# EAGLE board Jam Final (EAGLE 9.6.0)
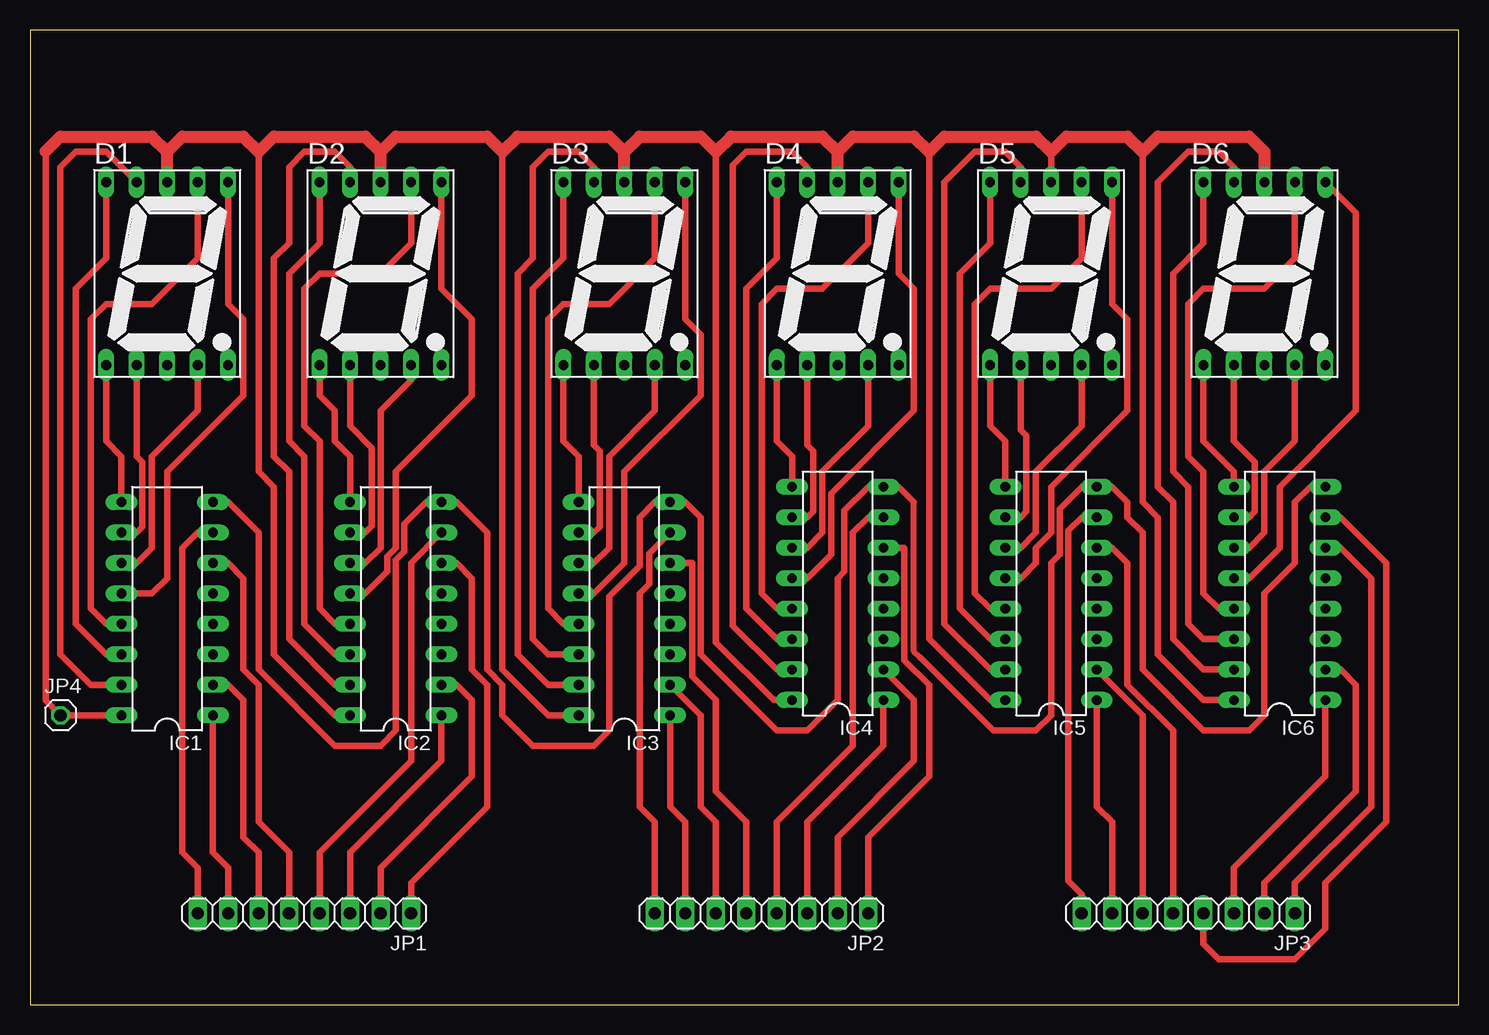
[diagram p0: board, top side]

Size 119.05 x 81.27 mm. Coordinates in mm from the lower left corner, seen from the top.
Outline: 0,0 119.05,0 119.05,81.27 0,81.27 0,0
Copper layers (1*16): Top 0.035mm / dielectric 1.5mm / Bottom 0.035mm
Design rules "default": minimum track width 6mil, minimum drill 0.35mm, track to track 6mil, track to pad 6mil, pad to pad 6mil, via to via 6mil, smd to smd 6mil, copper to edge 40mil, drill to drill 6mil, minimum pad ring 10mil, minimum via ring 8mil, stop-mask expansion 4mil, vias tented up to drill 0mil, thermal gap 10mil

## Footprints (pad centres in the part's own frame; a part is rotated, then mirrored left to right if it is on the bottom)
7SEG-13 = drill 0.813 long: 1 -5.08,-7.62; 2 -2.54,-7.62; 3 0,-7.62; 4 2.54,-7.62; 5 5.08,-7.62; 6 5.08,7.62; 7 2.54,7.62; 8 0,7.62; 9 -2.54,7.62; 10 -5.08,7.62
DIL16 = drill 0.813 long: 1 -8.89,-3.81; 2 -6.35,-3.81; 3 -3.81,-3.81; 4 -1.27,-3.81; 5 1.27,-3.81; 6 3.81,-3.81; 7 6.35,-3.81; 8 8.89,-3.81; 9 8.89,3.81; 10 6.35,3.81; 11 3.81,3.81; 12 1.27,3.81; 13 -1.27,3.81; 14 -3.81,3.81; 15 -6.35,3.81; 16 -8.89,3.81
1X08 = drill 1.016 long: 1 -8.89,0; 2 -6.35,0; 3 -3.81,0; 4 -1.27,0; 5 1.27,0; 6 3.81,0; 7 6.35,0; 8 8.89,0
1X01 = drill 1.016 octagon: 1 0,0

## Placement (x,y rotation side)
D1  [7SEG-13]  11.43,60.96 0 top
D2  [7SEG-13]  29.21,60.96 0 top
D3  [7SEG-13]  49.53,60.96 0 top
D4  [7SEG-13]  67.31,60.96 0 top
D5  [7SEG-13]  85.09,60.96 0 top
D6  [7SEG-13]  102.87,60.96 0 top
IC1  74LS47N  [DIL16]  11.43,33.02 90 top
IC2  74LS47N  [DIL16]  30.48,33.02 90 top
IC3  74LS47N  [DIL16]  49.53,33.02 90 top
IC4  74LS47N  [DIL16]  67.31,34.29 90 top
IC5  74LS47N  [DIL16]  85.09,34.29 90 top
IC6  74LS47N  [DIL16]  104.14,34.29 90 top
JP1  [1X08]  22.86,7.62 180 top
JP2  [1X08]  60.96,7.62 180 top
JP3  [1X08]  96.52,7.62 180 top
JP4  [1X01]  2.54,24.13 0 top

## Library data of the parts
D1-D6 = special
IC1-IC6 = 74xx-eu
JP1-JP4 = pinhead

## Nets
GND: IC1.8 IC2.8 IC3.8 IC4.8 IC5.8 IC6.8
N$1: D1.7 IC1.13
N$2: D1.6 IC1.12
N$3: D1.4 IC1.11
N$4: D1.2 IC1.10
N$5: D1.1 IC1.9
N$6: D1.9 IC1.15
N$7: D1.10 IC1.14
N$8: D2.7 IC2.13
N$9: D2.6 IC2.12
N$10: D2.4 IC2.11
N$11: D2.2 IC2.10
N$12: D2.1 IC2.9
N$13: D2.9 IC2.15
N$14: D2.10 IC2.14
N$15: D3.7 IC3.13
N$16: D3.6 IC3.12
N$17: D3.4 IC3.11
N$18: D3.2 IC3.10
N$19: D3.1 IC3.9
N$20: D3.9 IC3.15
N$21: D3.10 IC3.14
N$22: D4.7 IC4.13
N$23: D4.6 IC4.12
N$24: D4.4 IC4.11
N$25: D4.2 IC4.10
N$26: D4.1 IC4.9
N$27: D5.7 IC5.13
N$28: D5.6 IC5.12
N$29: D5.4 IC5.11
N$30: D5.2 IC5.10
N$31: D5.1 IC5.9
N$32: D6.7 IC6.13
N$33: D6.6 IC6.12
N$34: D5.9 IC5.15
N$35: D5.10 IC5.14
N$36: D6.4 IC6.11
N$37: D6.2 IC6.10
N$38: D6.1 IC6.9
N$39: D6.9 IC6.15
N$40: D6.10 IC6.14
N$41: IC1.7 JP1.8
N$42: IC1.1 JP1.7
N$43: IC1.2 JP1.6
N$44: IC1.6 JP1.5
N$45: IC2.7 JP1.4
N$46: IC2.1 JP1.3
N$47: IC2.2 JP1.2
N$48: IC2.6 JP1.1
N$49: IC3.7 JP2.8
N$50: IC3.1 JP2.7
N$51: IC3.2 JP2.6
N$52: IC3.6 JP2.5
N$53: IC4.7 JP2.4
N$54: IC4.1 JP2.3
N$55: IC4.2 JP2.2
N$56: IC4.6 JP2.1
N$57: IC5.7 JP3.8
N$58: IC5.1 JP3.7
N$59: IC5.2 JP3.6
N$60: IC5.6 JP3.5
N$61: IC6.7 JP3.4
N$62: IC6.1 JP3.3
N$63: IC6.2 JP3.2
N$64: IC6.6 JP3.1
N$65: D4.9 IC4.15
N$66: D4.10 IC4.14
VCC: D1.8 D2.8 D3.8 D4.8 D5.8 D6.8 IC1.16 IC2.16 IC3.16 IC4.16 IC5.16 IC6.16 JP4.1

## Tracks (layer width: path | path; a pad name or v marks a point on that pad's centre or on a via)
GND
  Top 0.508: 74.22,28.91 73.66,29.47 73.66,41.91 72.39,43.18 IC4.8
  Top 0.559: IC6.8 106.68,43.18 105.41,41.91 105.41,36.83 102.87,34.29 102.87,24.13 101.6,22.86 97.79,22.86 92.71,27.94 92.71,39.37 91.44,40.64 91.44,41.91 90.17,43.18 IC5.8 87.63,43.18 85.8,41.35 85.8,37.54 85.09,36.83 85.09,24.13 83.82,22.86 80.27,22.86 74.22,28.91 | IC1.8 16.51,41.91 19.05,39.37 19.05,27.94 25.4,21.59 29.21,21.59 30.48,22.86 30.48,37.09 31.19,37.8 31.19,40.08 33.02,41.91 IC2.8 35.56,41.91 38.1,39.37 38.1,27.94 39.37,26.67 39.37,24.13 41.91,21.59 46.99,21.59 48.26,22.86 48.26,34.03 50.8,36.57 50.8,40.64 52.07,41.91 IC3.8 54.61,41.91 55.88,40.64 55.88,29.21 62.23,22.86 64.77,22.86 67.31,25.4 67.31,35.56 67.87,36.12 67.87,41.2 69.85,43.18 IC4.8
N$1
  Top 0.559: D1.7 13.97,62.23 10.16,58.42 6.35,58.42 5.08,57.15 5.08,33.02 6.35,31.75 IC1.13
N$2
  Top 0.559: D1.6 16.51,58.42 17.78,57.15 17.78,50.8 11.43,44.45 11.43,35.56 10.16,34.29 IC1.12
N$3
  Top 0.559: D1.4 13.97,49.53 10.16,45.72 10.16,38.1 8.89,36.83 IC1.11
N$4
  Top 0.559: IC1.10 8.89,39.37 9.37,39.85 9.37,45.24 8.89,45.72 D1.2
N$5
  Top 0.559: D1.1 6.35,46.99 7.62,45.72 IC1.9
N$6
  Top 0.559: D1.9 6.35,71.12 3.81,71.12 2.54,69.85 2.54,29.21 5.08,26.67 IC1.15
N$7
  Top 0.559: IC1.14 6.35,29.21 3.81,31.75 3.81,59.69 6.35,62.23 D1.10
N$8
  Top 0.559: IC2.13 25.4,31.75 24.13,33.02 24.13,46.99 22.86,48.26 22.86,59.69 24.13,60.96 29.21,60.96 31.75,63.5 D2.7
N$9
  Top 0.559: D2.6 34.29,59.69 36.83,57.15 36.83,50.8 30.48,44.45 30.48,38.1 29.77,37.39 29.77,36.12 27.94,34.29 IC2.12
N$10
  Top 0.559: IC2.11 27.94,36.83 29.21,38.1 29.21,49.53 31.75,52.07 D2.4
N$11
  Top 0.559: D2.2 26.67,48.26 28.5,46.43 28.5,39.93 27.94,39.37 IC2.10
N$12
  Top 0.559: D2.1 24.13,50.8 25.4,49.53 25.4,46.99 26.67,45.72 IC2.9
N$13
  Top 0.559: IC2.15 25.4,26.67 21.59,30.48 21.59,44.45 20.32,45.72 20.32,62.23 21.59,63.5 21.59,69.85 22.86,71.12 25.4,71.12 26.67,69.85 D2.9
N$14
  Top 0.559: IC2.14 25.4,29.21 22.86,31.75 22.86,45.72 21.59,46.99 21.59,60.96 24.13,63.5 D2.10
N$15
  Top 0.559: D3.7 52.07,62.23 48.26,58.42 44.45,58.42 43.18,57.15 43.18,33.02 44.45,31.75 IC3.13
N$16
  Top 0.559: D3.6 54.61,57.15 55.88,55.88 55.88,50.8 49.53,44.45 49.53,36.83 46.99,34.29 IC3.12
N$17
  Top 0.559: D3.4 52.07,49.53 48.26,45.72 48.26,38.1 46.99,36.83 IC3.11
N$18
  Top 0.559: IC3.10 46.99,39.37 47.47,39.85 47.47,46.17 46.99,46.66 D3.2
N$19
  Top 0.559: D3.1 44.45,46.99 45.72,45.72 IC3.9
N$20
  Top 0.559: D3.9 46.99,69.85 45.72,71.12 43.18,71.12 41.91,69.85 41.91,62.23 40.64,60.96 40.64,29.21 43.18,26.67 IC3.15
N$21
  Top 0.559: D3.10 44.45,62.23 41.91,59.69 41.91,30.48 43.18,29.21 IC3.14
N$22
  Top 0.559: D4.7 69.85,63.5 66.04,59.69 62.23,59.69 60.96,58.42 60.96,34.29 62.23,33.02 IC4.13
N$23
  Top 0.559: D4.6 72.39,60.96 73.66,59.69 73.66,49.53 66.75,42.62 66.75,37.54 64.77,35.56 IC4.12 64.21,35.56
N$24
  Top 0.559: D4.4 69.85,48.26 66.04,44.45 66.04,39.37 64.77,38.1 IC4.11
N$25
  Top 0.559: D4.2 64.77,46.66 65.25,46.17 65.25,41.12 64.77,40.64 IC4.10
N$26
  Top 0.559: D4.1 62.23,46.99 63.5,45.72 IC4.9
N$27
  Top 0.559: D5.7 87.63,62.23 85.09,59.69 80.01,59.69 78.74,58.42 78.74,34.29 80.01,33.02 IC5.13
N$28
  Top 0.559: D5.6 90.17,58.42 91.44,57.15 91.44,49.53 85.09,43.18 85.09,39.37 83.82,38.1 83.82,36.83 82.55,35.56 IC5.12
N$29
  Top 0.559: D5.4 87.63,48.26 83.82,44.45 83.82,39.37 82.55,38.1 IC5.11
N$30
  Top 0.559: D5.2 82.55,47.92 83.03,47.44 83.03,43.18 83.03,42.39 83.03,41.12 82.55,40.64 IC5.10
N$31
  Top 0.559: D5.1 80.01,48.26 81.28,46.99 IC5.9
N$32
  Top 0.559: D6.7 105.41,62.23 102.87,59.69 97.79,59.69 96.52,58.42 96.52,45.72 97.79,44.45 97.79,34.29 99.06,33.02 IC6.13
N$33
  Top 0.559: D6.6 110.49,66.04 110.49,49.53 104.14,43.18 104.14,38.1 101.6,35.56 IC6.12
N$34
  Top 0.559: D5.9 82.55,69.85 81.28,71.12 78.74,71.12 76.2,68.58 76.2,31.75 80.01,27.94 IC5.15
N$35
  Top 0.559: D5.10 80.01,63.5 77.47,60.96 77.47,33.02 80.01,30.48 IC5.14
N$36
  Top 0.559: D6.4 105.41,46.99 102.87,44.45 102.87,39.37 101.6,38.1 IC6.11
N$37
  Top 0.559: IC6.10 101.6,40.64 102.08,41.12 102.08,45.24 100.33,46.99 D6.2
N$38
  Top 0.559: D6.1 97.79,46.99 100.33,44.45 IC6.9
N$39
  Top 0.559: D6.9 100.33,69.85 99.06,71.12 96.52,71.12 93.98,68.58 93.98,43.18 95.25,41.91 95.25,30.48 97.79,27.94 IC6.15
N$40
  Top 0.559: D6.10 97.79,63.5 95.25,60.96 95.25,44.45 96.52,43.18 96.52,31.75 97.79,30.48 IC6.14
N$41
  Top 0.559: IC1.7 13.97,39.37 12.7,38.1 12.7,12.7 13.97,11.43 JP1.8
N$42
  Top 0.559: JP1.7 16.51,11.43 15.24,12.7 IC1.1
N$43
  Top 0.559: IC1.2 16.51,26.67 17.78,25.4 17.78,13.97 19.05,12.7 JP1.6
N$44
  Top 0.559: IC1.6 16.51,36.83 17.78,35.56 17.78,27.94 19.05,26.67 19.05,15.24 21.59,12.7 JP1.5
N$45
  Top 0.559: JP1.4 24.13,12.7 31.75,20.32 31.75,36.83 IC2.7
N$46
  Top 0.559: JP1.3 26.67,12.7 34.29,20.32 IC2.1
N$47
  Top 0.559: IC2.2 35.56,26.67 36.83,25.4 36.83,19.05 29.21,11.43 JP1.2
N$48
  Top 0.559: IC2.6 35.56,36.83 36.83,35.56 36.83,30.48 36.83,29.21 36.83,27.94 38.1,26.67 38.1,16.51 31.75,10.16 JP1.1
N$49
  Top 0.559: JP2.8 52.07,15.24 50.8,16.51 50.8,34.29 51.59,35.08 51.59,37.62 IC3.7
N$50
  Top 0.559: JP2.7 54.61,15.24 53.34,16.51 IC3.1
N$51
  Top 0.559: IC3.2 55.88,24.13 55.88,16.51 57.15,15.24 JP2.6
N$52
  Top 0.559: 59.69,6.35 JP2.5 59.69,15.24 57.15,17.78 57.15,25.4 55.17,27.38 55.17,36.83 IC3.6
N$53
  Top 0.559: JP2.4 62.23,15.24 68.58,21.59 68.58,39.37 69.85,40.64 IC4.7
N$54
  Top 0.559: JP2.3 64.77,11.43 64.77,12.7 64.77,15.24 71.12,21.59 IC4.1
N$55
  Top 0.559: IC4.2 73.66,25.4 73.66,20.32 67.31,13.97 JP2.2
N$56
  Top 0.559: IC4.6 72.87,38.1 72.87,28.73 74.93,26.67 74.93,19.05 69.85,13.97 JP2.1
N$57
  Top 0.559: IC5.7 87.63,40.64 86.51,39.52 86.51,10.31 87.63,9.2 JP3.8
N$58
  Top 0.559: IC5.1 88.9,16.51 90.17,15.24 JP3.7
N$59
  Top 0.559: JP3.6 92.71,24.13 IC5.2
N$60
  Top 0.559: JP3.5 95.25,22.86 91.44,26.67 91.44,36.83 90.17,38.1 IC5.6
N$61
  Top 0.559: IC6.7 109.22,40.64 113.03,36.83 113.03,15.24 107.95,10.16 107.95,6.35 105.41,3.81 99.06,3.81 97.79,5.08 JP3.4
N$62
  Top 0.559: JP3.3 100.33,11.43 107.95,19.05 IC6.1
N$63
  Top 0.559: IC6.2 109.22,27.94 110.49,26.67 110.49,17.78 102.87,10.16 JP3.2
N$64
  Top 0.559: IC6.6 109.22,38.1 111.76,35.56 111.76,16.51 105.41,10.16 JP3.1
N$65
  Top 0.559: D4.9 64.77,69.85 63.5,71.12 59.69,71.12 58.57,70 58.57,31.6 62.23,27.94 IC4.15
N$66
  Top 0.559: D4.10 62.23,62.23 59.69,59.69 59.69,33.02 62.23,30.48 IC4.14
VCC
  Top 0.559: 85.09,71.12 D5.8 | IC5.16 80.01,25.4 74.93,30.48 74.93,71.12 | 92.71,71.12 92.71,41.91 93.98,40.64 93.98,29.21 97.79,25.4 IC6.16 | IC2.16 25.4,24.13 20.32,29.21 20.32,43.18 19.05,44.45 19.05,71.12 | IC3.16 43.18,24.13 39.37,27.94 39.37,71.12 | IC4.16 61.97,25.4 57.15,30.22 57.15,71.12 | IC1.16 JP4.1 1.29,25.38 1.29,71.14
  Top 1.016: 11.43,71.12 10.16,72.39 2.54,72.39 1.29,71.14 | 11.43,71.12 12.7,72.39 17.78,72.39 19.05,71.12 20.32,72.39 27.94,72.39 29.21,71.12 | 29.21,71.12 30.48,72.39 38.1,72.39 39.37,71.12 40.64,72.39 48.26,72.39 49.53,71.12 | 49.53,71.12 50.8,72.39 55.88,72.39 57.15,71.12 58.42,72.39 66.04,72.39 67.31,71.12 | 67.31,71.12 68.58,72.39 73.66,72.39 74.93,71.12 76.2,72.39 83.82,72.39 85.09,71.12 86.36,72.39 91.44,72.39 92.71,71.12 93.98,72.39 101.6,72.39 102.87,71.12 D6.8 | D1.8 11.43,71.12 | D2.8 29.21,71.12 | D3.8 49.53,71.12 | D4.8 67.31,71.12